# Altium PCB pcb.PcbDoc
Units mm, origin at the board's own origin, x right, y up, seen from the top; angles counter-clockwise.
Board outline 17.4 x 42 mm, 2 copper layers (Top Layer, Bottom Layer), stack 1.58 mm thick; 2 components, 11 nets, 24 pads, 5 vias.
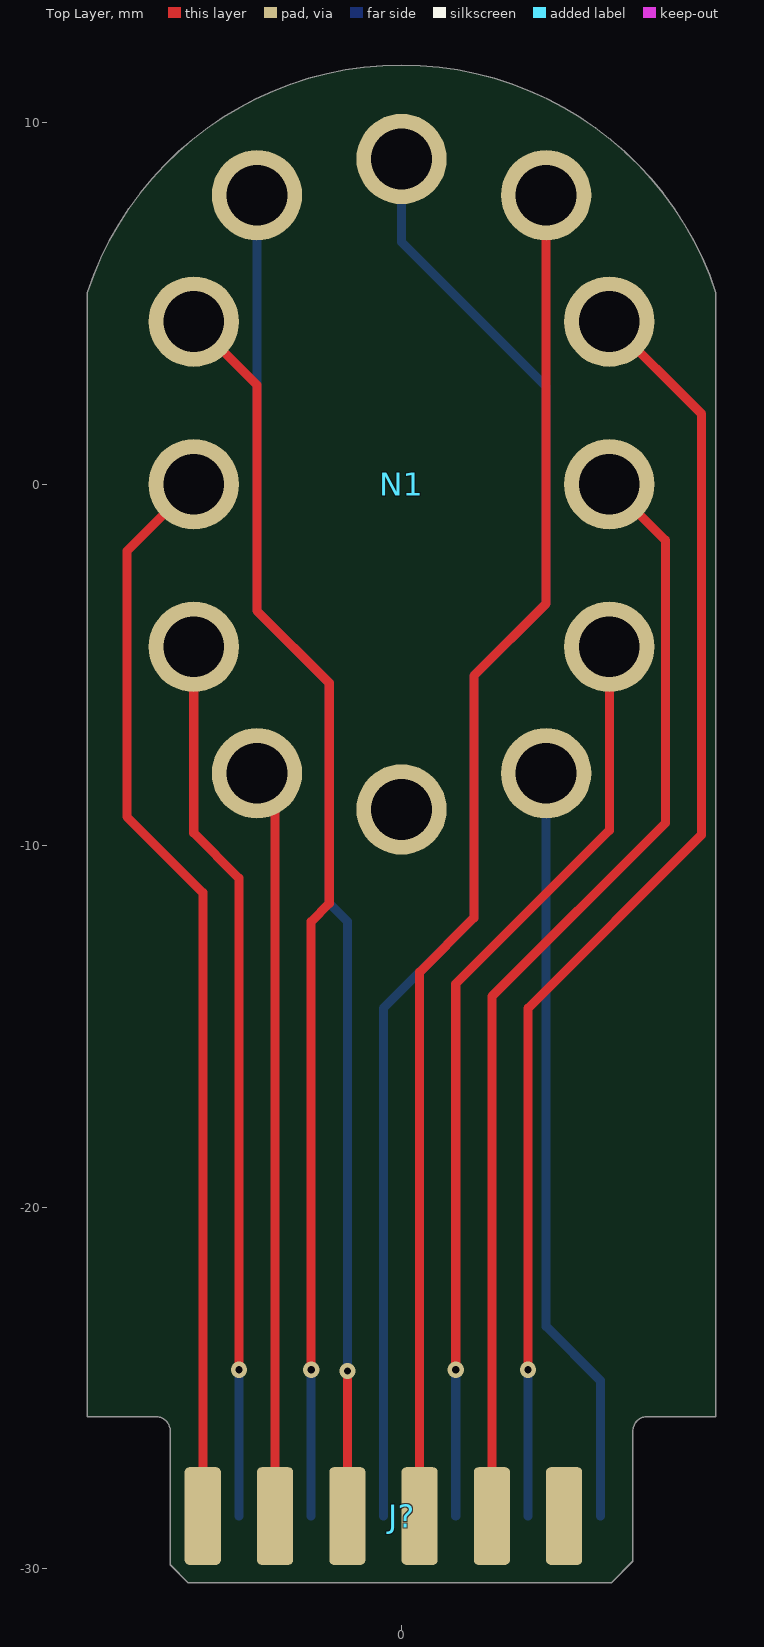
[diagram p0: Top Layer view]
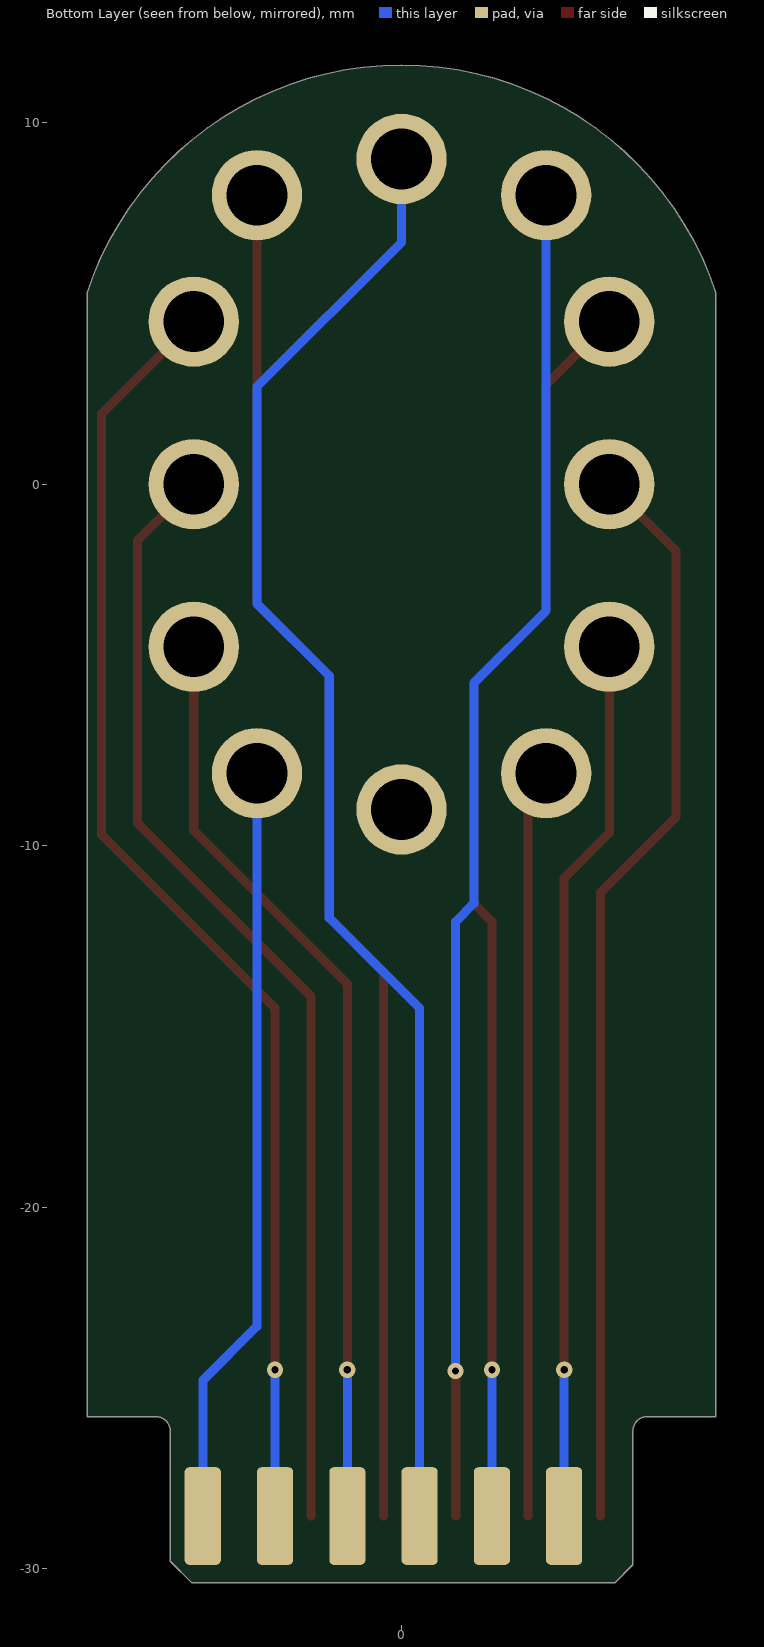
[diagram p1: Bottom Layer view, seen from below]

## Layer stack, top to bottom
Top Solder: solder mask 0.01, Solder Resist, Dk 3.5
Top Layer: signal copper 0.04
Dielectric 1: dielectric 1.5, FR-4, Dk 4.8
Bottom Layer: signal copper 0.04
Bottom Solder: solder mask 0.01, Solder Resist, Dk 3.5

## Board outline
-6.4,-29.9 -6.4,-26.2 ccw(c-6.8,-26.2) -6.8,-25.8 -8.7,-25.8 -8.7,5.3 -8.698,5.3 cw(c0.001,2.44) 8.7,5.3 8.7,-25.8 6.8,-25.8 ccw(c6.8,-26.2) 6.4,-26.2 6.4,-29.8 5.8,-30.4 -5.9,-30.4

## Design rules (kind name [scope] priority, off if disabled: settings)
BoardOutlineClearance [All] p1: gap=0.198 ignorepadtopadclearanceinfootprint=FALSE except(0: Arc-SplitContinuation Track-SplitContinuation SMDPad-SplitContinuation THPad-SplitContinuation Via-SplitContinuation Fill-SplitContinuation Poly-SplitContinuation Region-SplitContinuation Text-SplitContinuation)
Clearance [All] p1: gap=0.152 ignorepadtopadclearanceinfootprint=TRUE except(0.305: Arc-Hole Track-Hole SMDPad-Hole THPad-Hole Via-Hole Fill-Hole Poly-Hole Region-Hole Text-Hole; 0.687: Arc-Arc Arc-Track Arc-SMDPad Arc-Fill Arc-Poly Arc-Region Track-Track Track-SMDPad Track-Fill Track-Poly Track-Region)
ComponentClearance [All] p1: gap=0.1 collisioncheckmode=3 verticalgap=0.1 showdistances=FALSE
DiffPairsRouting DiffPairsRouting_USB [InDifferentialPair('USB')] p1: maxlimit=0.5 minlimit=0.16 mostfreqgap=0.2 toplayer_minwidth=0.16 toplayer_maxwidth=5 toplayer_prefwidth=0.265 bottomlayer_minwidth=0.16 bottomlayer_maxwidth=5 bottomlayer_prefwidth=0.265 maxuncoupledlength=12.7
DiffPairsRouting DiffPairsRouting_ETH [InDifferentialPair('ETH_RX') or InDifferentialPair('ETH_TX')] p2: maxlimit=0.5 minlimit=0.16 mostfreqgap=0.194 toplayer_minwidth=0.16 toplayer_maxwidth=5 toplayer_prefwidth=0.22 bottomlayer_minwidth=0.16 bottomlayer_maxwidth=5 bottomlayer_prefwidth=0.22 maxuncoupledlength=12.7
DiffPairsRouting [All] p3: maxlimit=0.5 minlimit=0.16 mostfreqgap=0.3 toplayer_minwidth=0.16 toplayer_maxwidth=5 toplayer_prefwidth=0.3 bottomlayer_minwidth=0.16 bottomlayer_maxwidth=5 bottomlayer_prefwidth=0.3 maxuncoupledlength=12.7
HoleSize [All] p1: absolutevalues=TRUE maxlimit=6.3 minlimit=0.025 maxpercent=80.000 minpercent=20.000
MatchedLengths MatchedLengths_1 [InNetClass('RX')] p1: tolerance=2 checknetsindiffpair=FALSE checkdiffpairvsdiffpair=TRUE checkxsignals=TRUE checkothers=TRUE
MatchedLengths [InNetClass('TX')] p2: tolerance=2 checknetsindiffpair=FALSE checkdiffpairvsdiffpair=TRUE checkxsignals=TRUE checkothers=TRUE
MinimumAnnularRing [All] p1: minimumring=0.102
MinimumSolderMaskSliver [All] p1: minsoldermaskwidth=0.1
PlaneClearance [All] p1: clearance=0.1
PlaneConnect [All] p1: planeconnectstyle=Relief reliefexpansion=0.15 reliefentries=4 reliefconductorwidth=0.152 reliefairgap=0.2
PolygonConnect [All] p1: connectstyle=Relief reliefconductorwidth=0.152 reliefentries=4 polygonreliefangle="90 Angle" airgapwidth=0.152
RoutingVias [All] p1: holewidth=0.3 width=0.6 viastyle="Through Hole" minholewidth=0.2 minwidth=0.45 maxholewidth=6.3 maxwidth=10
SilkToSilkClearance [All] p1: silktosilkclearance=0.152
SilkToSolderMaskClearance [IsPad] p1: minsilkscreentomaskgap=0.152 clearancetoexposedcopper=TRUE
SolderMaskExpansion [All] p1: expansion=0.076 istentingtop=FALSE
Width [All] p1: maxlimit=10 minlimit=0.152 preferedwidth=0.152 minimp=50.000000 maximp=50.000000 favimp=50.000000
22 further rules are at their usual default settings.

## Classes and differential pairs
component class schematic: N1

## Components (designator, comment, footprint, x,y, rotation, side; value= is the part's Value field where it differs from the comment)
J? "Header 2mm" "male edge connector" 6.4,-30.4 r0 top
N1 "nixie_socket" "NIXIE SOCKET" 0,0 r0 top

## Footprints (in the part's own frame and the unit in brackets; to place one, negate y for a bottom-side part, rotate by r counter-clockwise, add the part's x,y. Pads: shape width x height; smd on the part's side, far side on the other; paste and mask are expansions set on the pad)
"male edge connector" [mm]
  rrect25% 1x2.7 smd: 1(-11.9,1.85) 3(-9.9,1.85) 5(-7.9,1.85) 7(-5.9,1.85) 9(-3.9,1.85) 11(-1.9,1.85)
  rrect25% 1x2.7 smd far side: 2(-10.9,1.85) 4(-8.9,1.85) 6(-6.9,1.85) 8(-4.9,1.85) 10(-2.9,1.85) 12(-0.9,1.85)
"NIXIE SOCKET" [mm]
  round 2.5 hole 1.68: 1(4,-8) 2(5.75,-4.5) 3(5.75,0) 4(5.75,4.5) 5(4,8) 6(0,9) 7(-4,8) 8(-5.75,4.5) 9(-5.75,0) 10(-5.75,-4.5) 11(-4,-8) 12(0,-9)
  body extent -10,-15 10,15, height 22.02

## Part data
J?: library part "edge connector_male", "Header male 1x6, pitch 2mm", ComponentLink1Description=link

## Via types
v1: diameter 0.45, hole 0.2, Top Layer to Bottom Layer, tented both sides, 5 vias

## Nets (pads, with @x,y where several pads share a name; then routed paths per layer and width w, separated by ;. In a path a pad name is that pad's centre, name@x,y a point inside that pad or via, vN(x,y) a via of type N, cw(c..) or ccw(c..) an arc to the next point about the centre after c; other vN are vias at no path point)
180V: J?.12 N1.1 | length 21.2
  Bottom Layer w0.25: N1.1 4,-23.3 5.5,-24.8 J?.12
D0: J?.8 N1.2 | length 25.8
  Top Layer w0.25: v1(1.5,-24.5) 1.5,-13.825 5.75,-9.575 N1.2
  Bottom Layer w0.25: J?.8 v1(1.5,-24.5)
D1: J?.3 N1.11 | length 20.8
  Top Layer w0.25: N1.11 -4,-8.609 -3.5,-9.109 J?.3
D2: J?.2 N1.10 | length 24.6
  Top Layer w0.25: N1.10 -5.75,-9.65 -4.5,-10.9 v1(-4.5,-24.5)
  Bottom Layer w0.25: J?.2 v1(-4.5,-24.5)
D3: J?.1 N1.9 | length 30.2
  Top Layer w0.25: N1.9 -7.6,-1.85 -7.6,-9.2 -5.5,-11.3 J?.1
D4: J?.4 N1.8 | length 34.8
  Top Layer w0.25: N1.8 -4,2.75 -4,-3.5 -2,-5.5 -2,-11.6 -2.5,-12.1 v1(-2.5,-24.5)
  Bottom Layer w0.25: J?.4 -2.5,-25.225 v1(-2.5,-24.5)
D5: J?.5 N1.7 | length 37.6
  Top Layer w0.25: J?.5 -1.5,-24.685 -1.495,-24.68 v1(-1.495,-24.538)
  Bottom Layer w0.25: N1.7 -4,-3.5 -2,-5.5 -2,-11.6 -1.495,-12.105 v1(-1.495,-24.538)
D6: J?.6 N1.6 | length 41.1
  Bottom Layer w0.25: J?.6 -0.5,-14.5 2,-12 2,-5.3 4,-3.3 4,2.7 0,6.7 N1.6
D7: J?.7 N1.5 | length 38
  Top Layer w0.25: J?.7 0.5,-13.5 2,-12 2,-5.3 4,-3.3 N1.5
D8: J?.10 N1.4 | length 36.1
  Top Layer w0.25: v1(3.5,-24.5) 3.5,-14.5 8.3,-9.7 8.3,1.95 N1.4
  Bottom Layer w0.25: J?.10 v1(3.5,-24.5)
D9: J?.9 N1.3 | length 31.2
  Top Layer w0.25: J?.9 2.5,-14.175 7.3,-9.375 7.3,-1.55 N1.3
pads on no net: J?.11 N1.12

## Silkscreen, mask and mechanical layers (free items; w line width, h text height)
Mechanical 15:
  lines w0.01: -8.698,5.3 cw(c0.001,2.44) 8.7,5.3 ; 0,11.545 0,11.6 0,5.3 ; -8.7,-25.8 -8.7,-30.4 8.7,-30.4 8.7,-25.8 ; -8.7,-25.8 -8.7,5.3 8.7,5.3 ; -8.7,-25.8 8.7,-25.8 ; 0,5.3 0,5.3 ; 0,5.3 8.7,5.3 ; 8.7,-25.8 8.7,5.3
  lines w0.1: -7.5,-25.3 7.5,-25.3